# Altium PCB PCB_PDB.PcbDoc
Units mm, origin at the board's own origin, x right, y up, seen from the top; angles counter-clockwise.
Board outline 100 x 100 mm, 2 copper layers (Top Layer, Bottom Layer); 64 components, 16 nets, 168 pads, 9 vias.
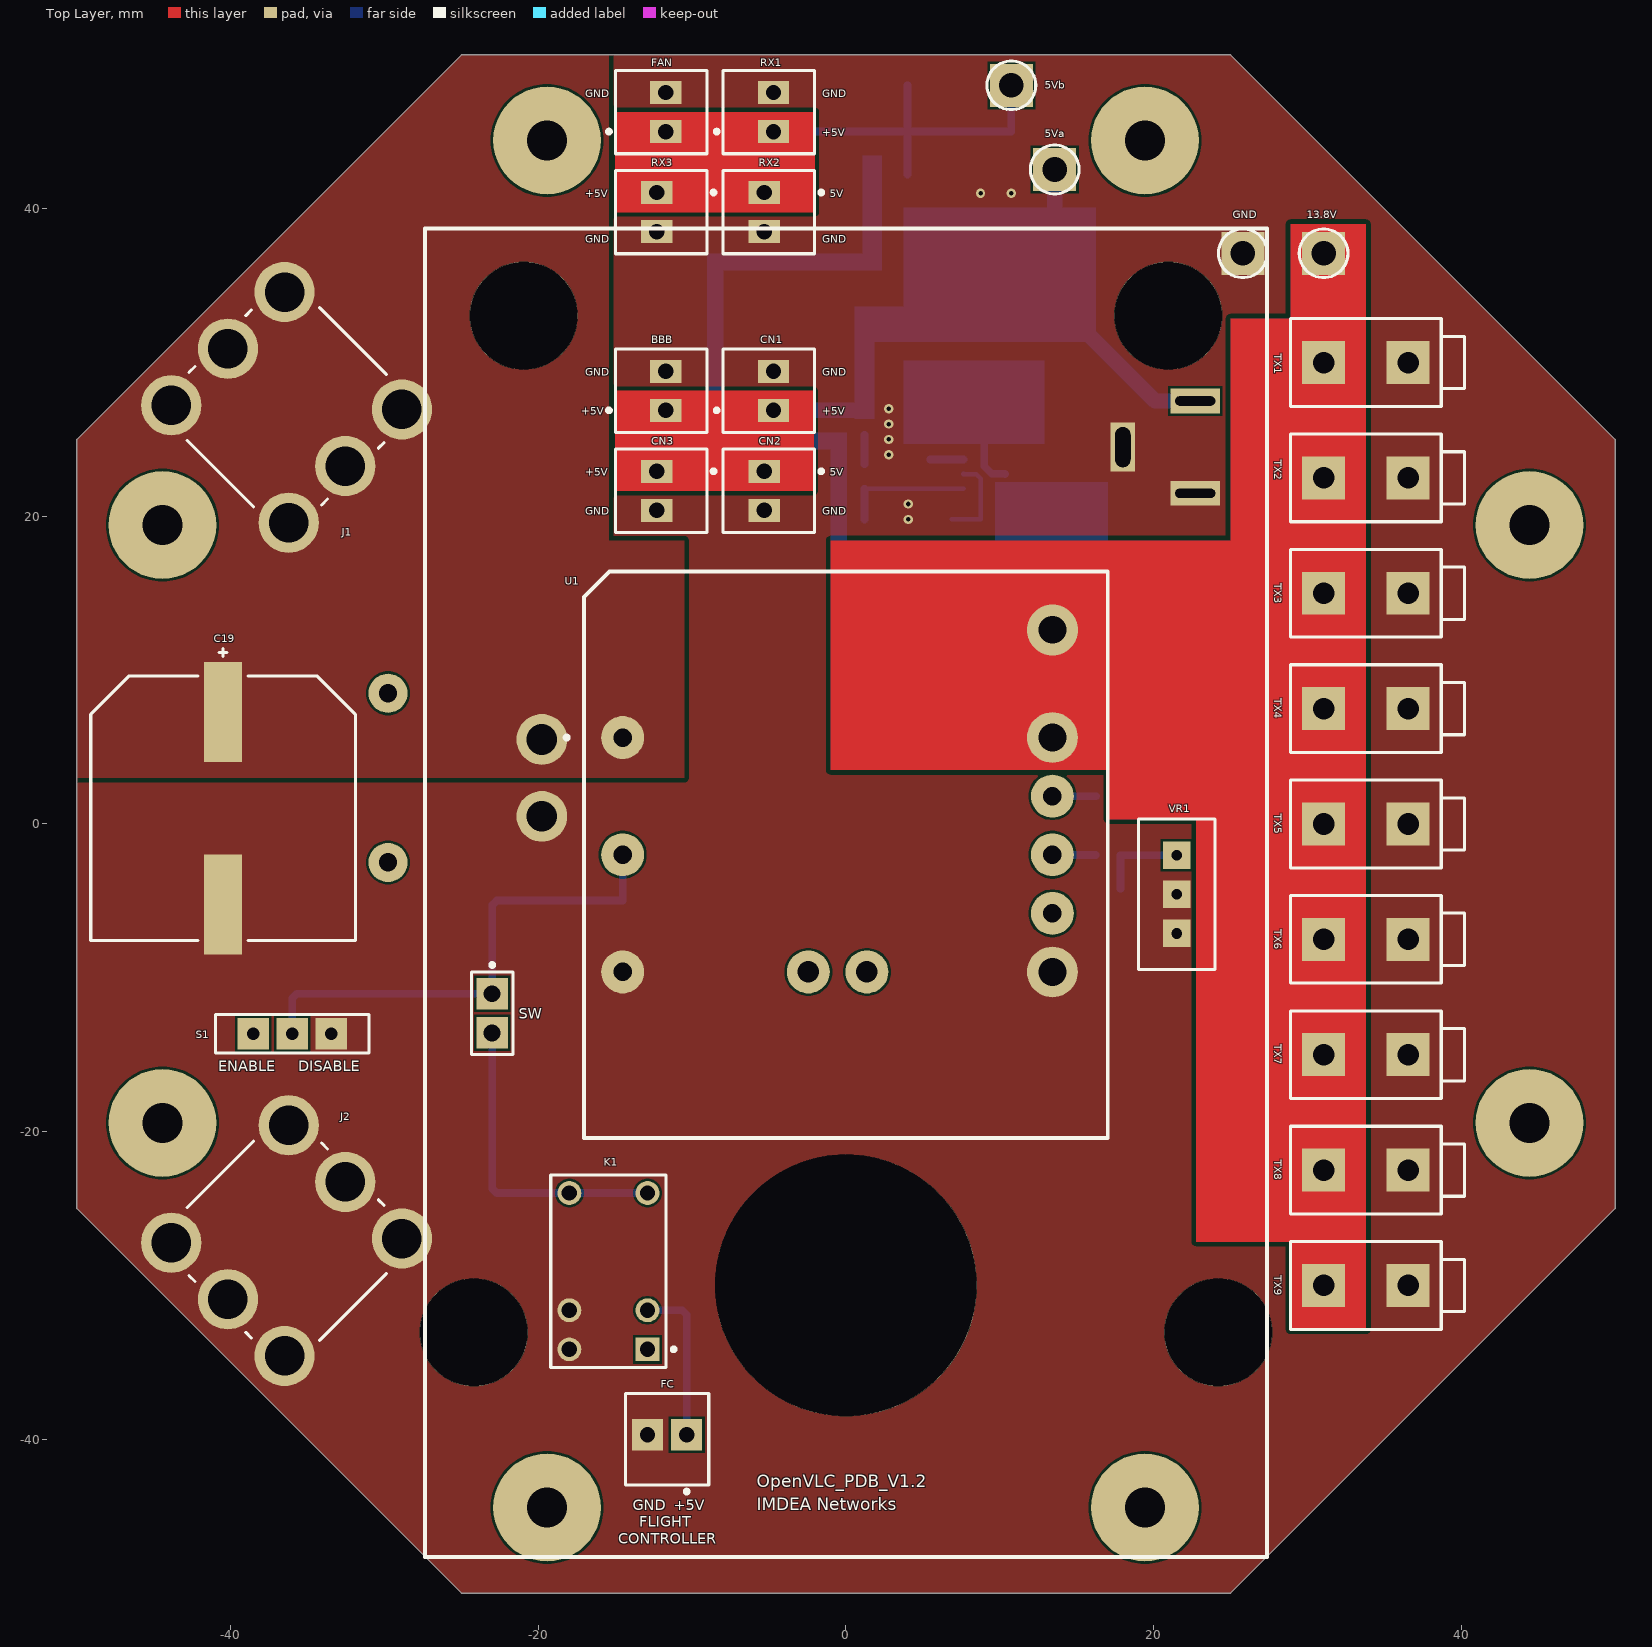
[diagram p0: Top Layer view]
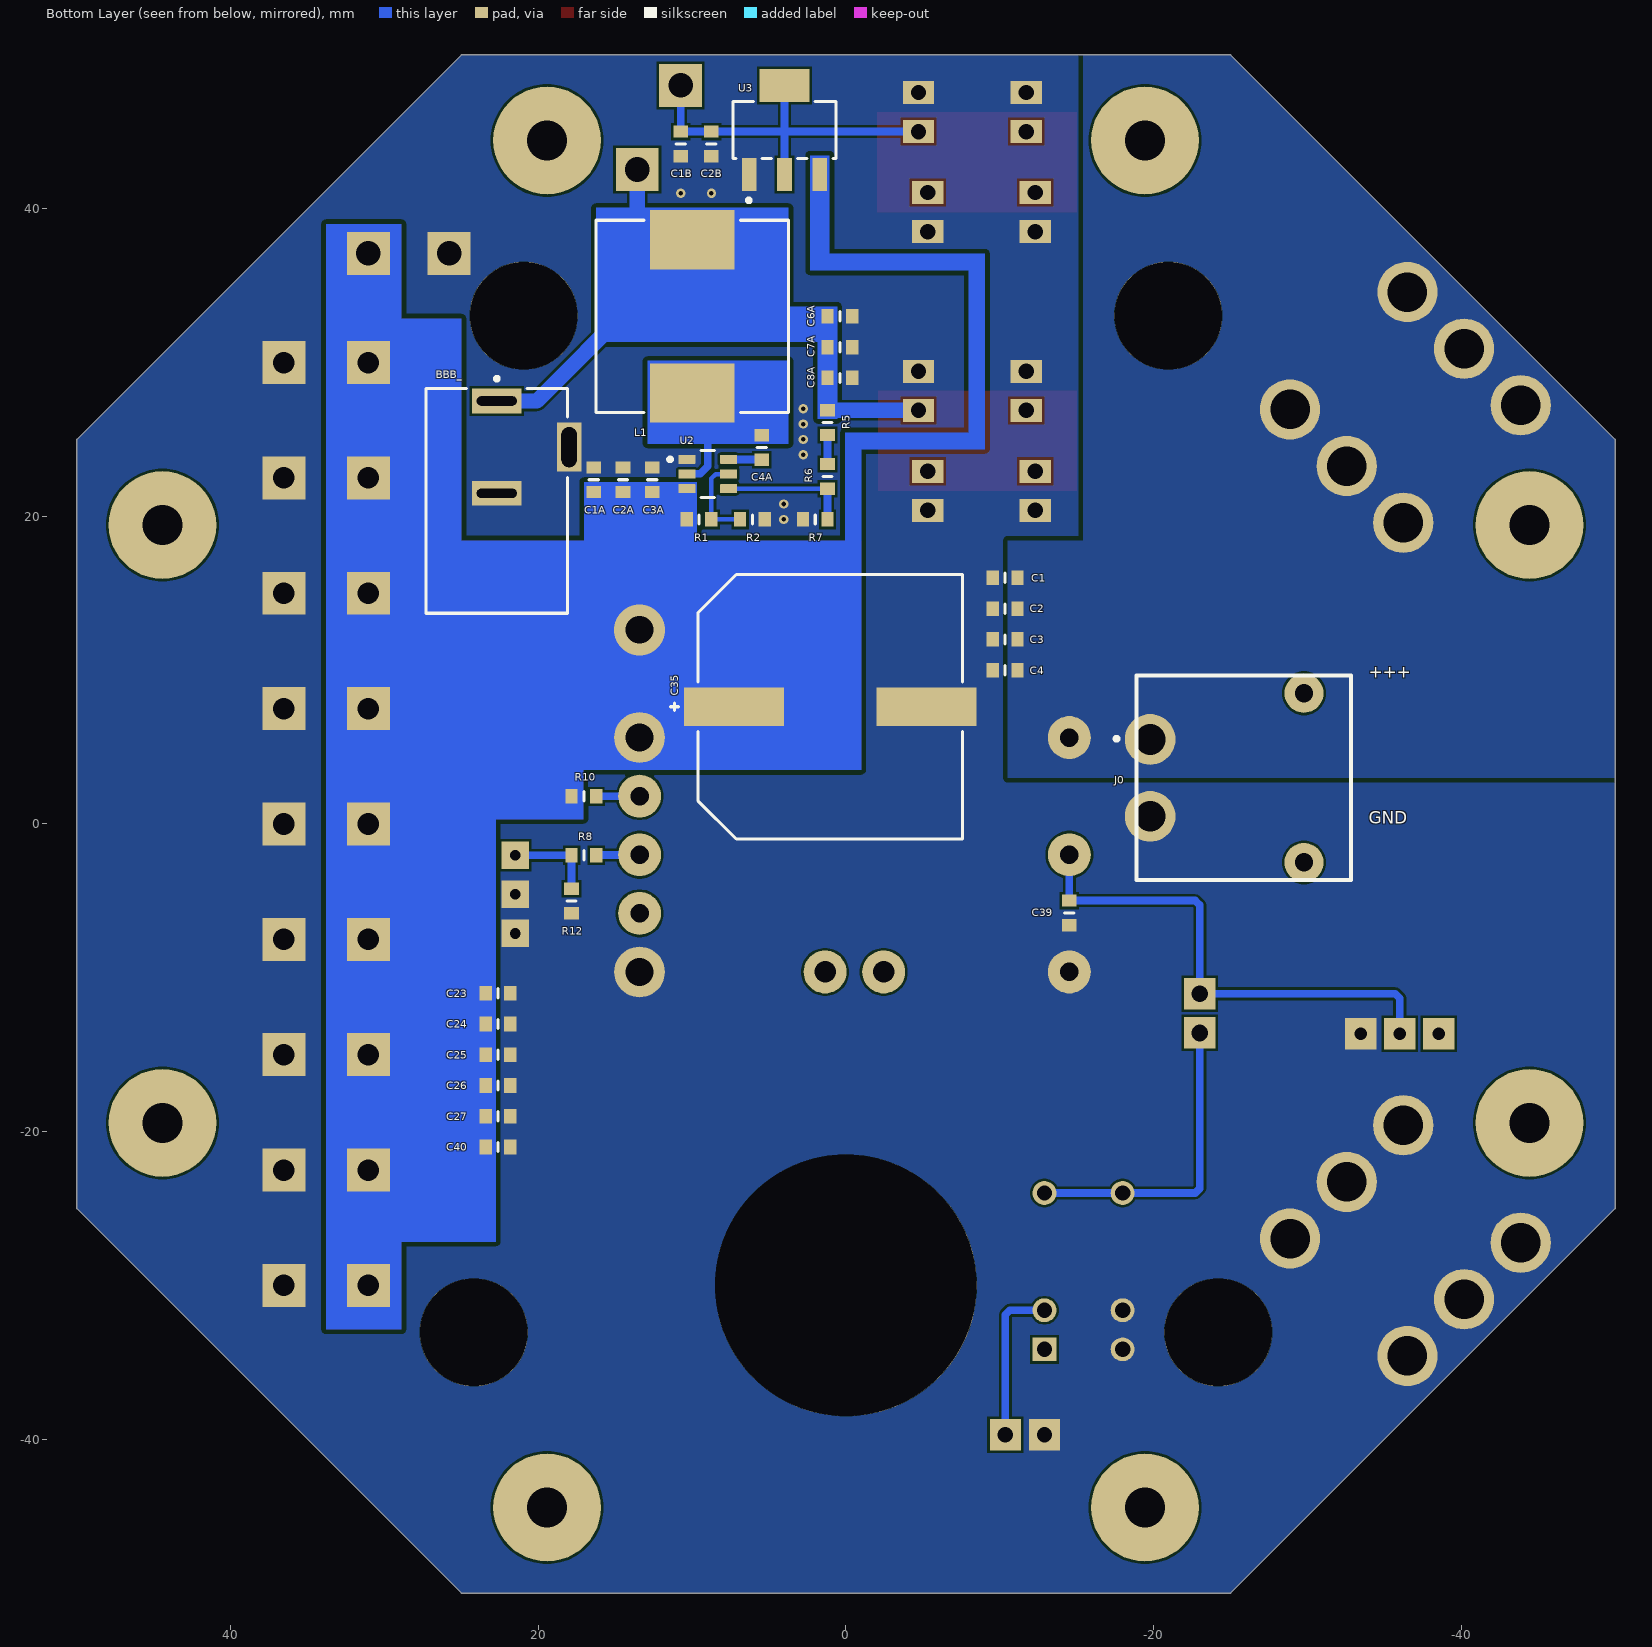
[diagram p1: Bottom Layer view, seen from below]
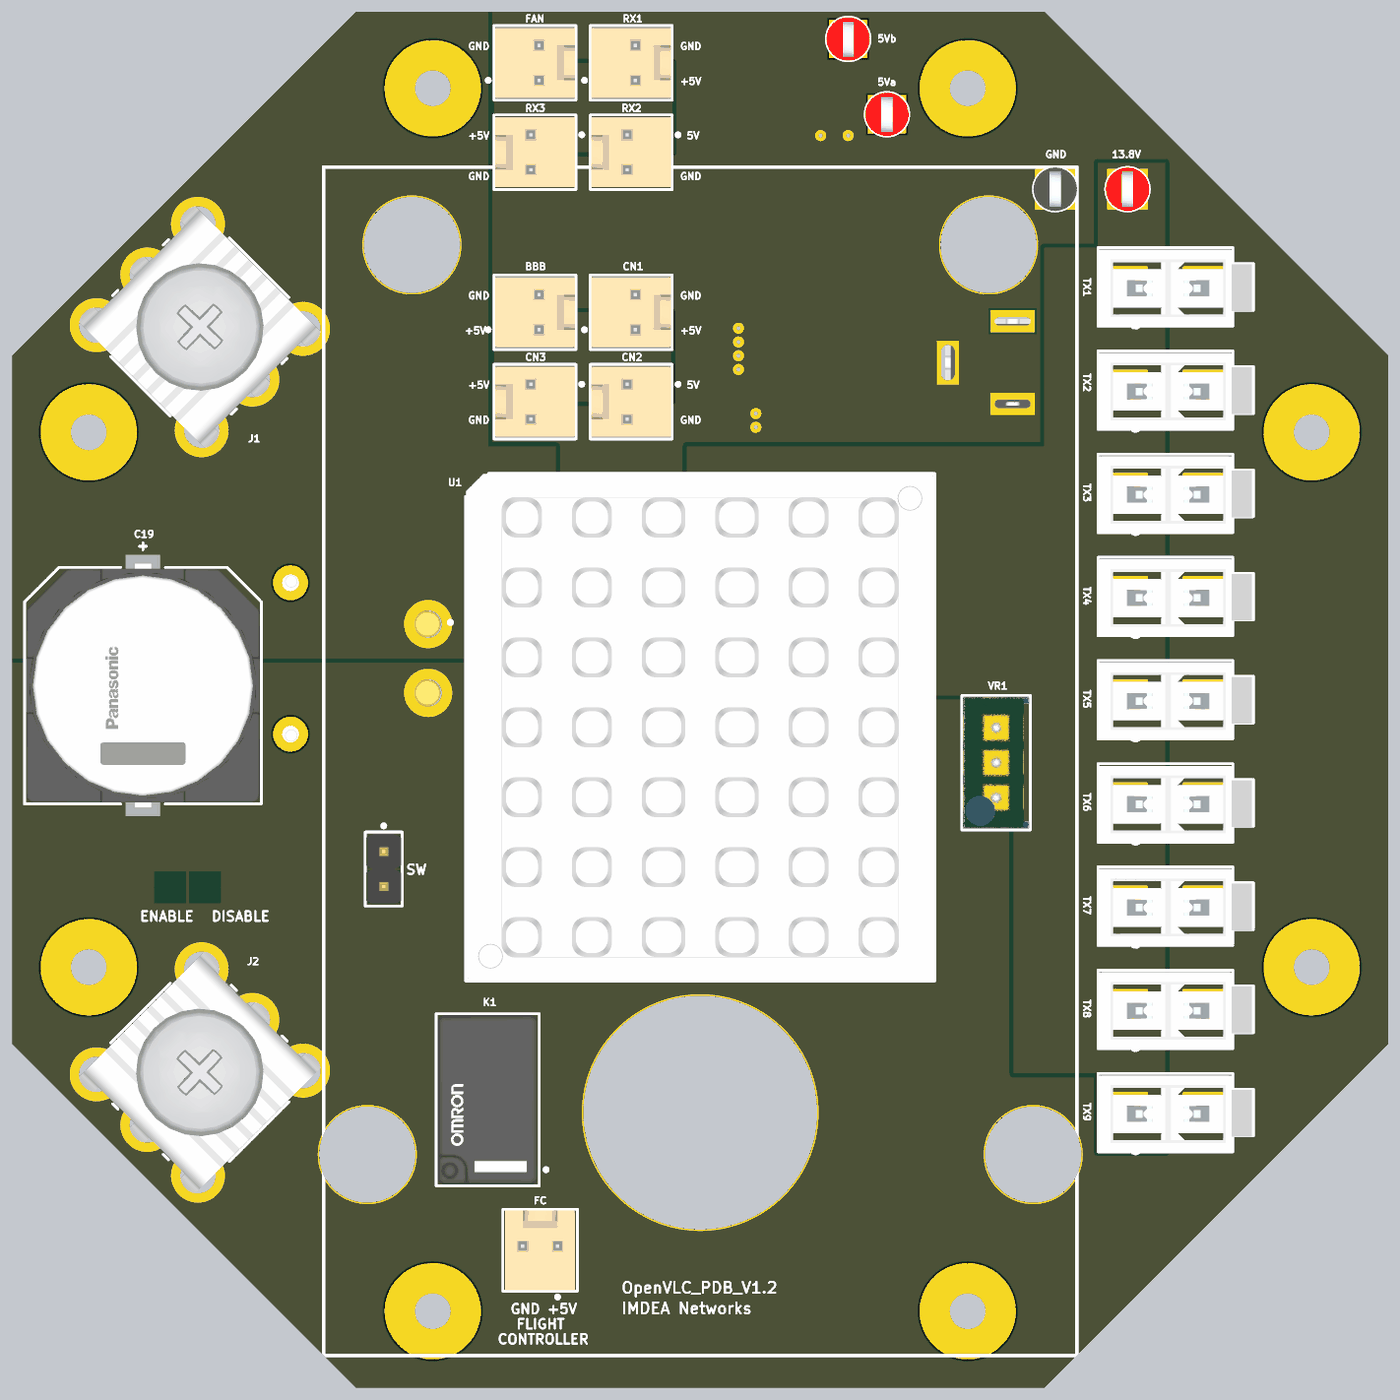
[diagram p2: 3D render of the assembled board from above, using the file's embedded part models]

## Layer stack, top to bottom
Top Solder: solder mask 0.0102, Solder Resist, Dk 3.5
Top Layer: signal copper 0.07
Dielectric1: dielectric 0.32, FR-4, Dk 4.8
Bottom Layer: signal copper 0.07
Bottom Solder: solder mask 0.0102, Solder Resist, Dk 3.5

## Board outline
-50,-25 -25,-50 25,-50 50,-25 50,25 25,50 -25,50 -50,25

## Design rules (kind name [scope] priority, off if disabled: settings)
Clearance Clearance_1 [(InNet('GND') AND InComponent('DC-DC'))] p1: gap=0.5 ignorepadtopadclearanceinfootprint=FALSE except(0: Arc-Hole Track-Hole SMDPad-Hole THPad-Hole Via-Hole Fill-Hole Poly-Hole Region-Hole Text-Hole)
Clearance [All] p2: gap=0.15 ignorepadtopadclearanceinfootprint=FALSE except(0: Arc-Hole Track-Hole SMDPad-Hole THPad-Hole Via-Hole Fill-Hole Poly-Hole Region-Hole Text-Hole; 0.3: Fill-Fill Fill-Poly Fill-Region Poly-Poly Poly-Region Region-Region)
DiffPairsRouting [All] p1: maxlimit=0.3 minlimit=0.3 mostfreqgap=0.3 toplayer_minwidth=0.381 toplayer_maxwidth=0.381 toplayer_prefwidth=0.381 bottomlayer_minwidth=0.381 bottomlayer_maxwidth=0.381 bottomlayer_prefwidth=0.381 maxuncoupledlength=12.7
Height [All] p1: minheight=0 maxheight=40 prefheight=12.7
HoleSize [All] p1: absolutevalues=TRUE maxlimit=2.54 minlimit=0.25 maxpercent=80.000 minpercent=20.000
MinimumSolderMaskSliver [All] p1: minsoldermaskwidth=0.15
PlaneClearance [All] p1: clearance=0.5
PlaneConnect [All] p1: planeconnectstyle=Direct reliefexpansion=0.508 reliefentries=4 reliefconductorwidth=0.254 reliefairgap=0.254
PolygonConnect PolygonConnect_1 [IsVia & InNet('GND')] p1: connectstyle=Direct reliefconductorwidth=0.254 reliefentries=4 polygonreliefangle="90 Angle" airgapwidth=0
PolygonConnect [All] p2: connectstyle=Direct reliefconductorwidth=0.254 reliefentries=4 polygonreliefangle="90 Angle" airgapwidth=0.254
RoutingVias [All] p1: holewidth=0.711 width=1.27 viastyle="Through Hole" minholewidth=25 minwidth=0.55 maxholewidth=0.711 maxwidth=1.27
SMDNeckDown [All] p1: percent=80.000
SilkToSilkClearance [All] p1: silktosilkclearance=0.15
SilkToSolderMaskClearance [IsPad] p1: minsilkscreentomaskgap=0.15 clearancetoexposedcopper=TRUE
SolderMaskExpansion [All] p1: expansion=0.102 istentingtop=FALSE
SupplyNets "Schematic Supply Nets_1" [InNet('+13.8V')] p1: voltage=0.000
SupplyNets "Schematic Supply Nets" [InNet('GND')] p2: voltage=0.000
Width [All] p1: maxlimit=1 minlimit=0.15 preferedwidth=0.3 minimp=50.000000 maximp=50.000000 favimp=50.000000
22 further rules are at their usual default settings.

## Components (designator, comment, footprint, x,y, rotation, side; value= is the part's Value field where it differs from the comment)
5Va "5010" KSTN-5010_V 13.57,42.547 r90 top
5Vb "5010" KSTN-5010_V 10.75,48.02 r90 top
13.8V "5010" KSTN-5010_V 31.05,37.1 r90 top
BBB "61900211121" 61900211121#1 -12.011,28.159 r270 top
BBB_ "PJ-102A" FP-PJ-102A-MFG 22.7,21 r0 bottom
C1 "GRM188R6YA106MA73D" RESC1608X55N -10.35,16 r180 bottom value=10uF
C1A "GRM188R6YA106MA73D" RESC1608X55N 16.4,22.38 r270 bottom value=10uF
C1B "GRM188R6YA106MA73D" RESC1608X55N 10.75,44.214 r90 bottom value=10uF
C2 "GRM188R6YA106MA73D" RESC1608X55N -10.35,14 r180 bottom value=10uF
C2A "GRM188R6YA106MA73D" RESC1608X55N 14.5,22.38 r270 bottom value=10uF
C2B "GCM188R71H104KA57J" RESC1608X55N 8.75,44.214 r270 bottom value=100nF
C3 "GRM188R6YA106MA73D" RESC1608X55N -10.35,12 r180 bottom value=10uF
C3A "GRM188R6YA106MA73D" RESC1608X55N 12.6,22.38 r270 bottom value=100nF
C4 "GCM188R71H104KA57J" RESC1608X55N -10.35,10 r0 bottom value=100nF
C4A "GRM188R6YA106MA73D" RESC1608X55N 5.473,24.479 r270 bottom value=100nF
C6A "GRM188R6YA106MA73D" RESC1608X55N 0.4,33 r0 bottom value=22uF
C7A "GRM188R6YA106MA73D" RESC1608X55N 0.4,31 r0 bottom value=22uF
C8A "GCM188R71H104KA57J" RESC1608X55N 0.4,29 r180 bottom value=100nF
C19 "EEE-FK1H102AV" CAP-17x17 -40.5,1 r0 top
C23 "GRM188R6YA106MA73D" RESC1608X55N 22.62,-11 r0 bottom value=10uF
C24 "GRM188R6YA106MA73D" RESC1608X55N 22.62,-13 r0 bottom value=10uF
C25 "GRM188R6YA106MA73D" RESC1608X55N 22.62,-15 r0 bottom value=10uF
C26 "GRM188R6YA106MA73D" RESC1608X55N 22.62,-17 r0 bottom value=10uF
C27 "GRM188R6YA106MA73D" RESC1608X55N 22.62,-19 r0 bottom value=10uF
C35 "EEE-FK1H102AV" CAP-17x17 1,7.62 r90 bottom
C39 "GCM188R71H104KA57J" RESC1608X55N -14.52,-5.777 r270 bottom value=100nF
C40 "GCM188R71H104KA57J" RESC1608X55N 22.62,-21 r0 bottom value=100nF
CN1 "61900211121" 61900211121#1 -5.011,28.159 r270 top
CN2 "61900211121" 61900211121#1 -5.011,21.659 r90 top
CN3 "61900211121" 61900211121#1 -12.011,21.659 r90 top
FAN "61900211121" 61900211121#1 -12.011,46.284 r270 top
FC "61900211121" 61900211121#2 -11.633,-40 r0 top
GND "5011" KSTN-5011_V 25.8,37.1 r90 top
J0 "XT30PW-M" XT30-Footprint-1 -25.849,3 r270 bottom
J1 "8196" FP-8196-MFG -36.365,27.085 r45 top
J2 "8196" FP-8196-MFG -36.365,-27.085 r135 top
K1 "G5V-13 DC5" FP-G5V-13_DC5-MFG -15.443,-29.072 r90 top
L1 "SLF12575T-330M3R2-PF" EATN-DR125_V 10,33 r90 bottom
R1 "RN73R1JTTD53R0B25" RESC1608X55N 9.55,19.8 r180 bottom value=174k
R2 "RN73R1JTTD53R0B25" RESC1608X55N 6.085,19.8 r180 bottom value=36k5
R5 "RN73R1JTTD53R0B25" RESC1608X55N 1.2,26.089 r270 bottom value=49.9
R6 "RN73R1JTTD53R0B25" RESC1608X55N 1.2,22.602 r270 bottom value=52k3
R7 "RN73R1JTTD53R0B25" RESC1608X55N 2,19.8 r0 bottom value=10k
R8 "RN73R1JTTD53R0B25" RESC1608X55N 17.041,-2.034 r0 bottom value=53
R10 "RMCF0603ZT0R00" RESC1608X55N 17.041,1.81 r180 bottom value=0
R12 "RK73H1JTTD2001D" RESC1608X55N 17.841,-5.01 r90 bottom value=3k
RX1 "61900211121" 61900211121#1 -5.011,46.284 r270 top
RX2 "61900211121" 61900211121#1 -5.011,39.784 r90 top
RX3 "61900211121" 61900211121#1 -12.011,39.784 r90 top
S1 "450301014042" 450301014042 -1306,-1283.64 r180 top
SW "61300211121" 61300211121 -23,-12.305 r270 top
TX1 "64900221122" 64900221122 33.8,30 r270 top
TX2 "64900221122" 64900221122 33.8,22.5 r270 top
TX3 "64900221122" 64900221122 33.8,15 r270 top
TX4 "64900221122" 64900221122 33.8,7.5 r270 top
TX5 "64900221122" 64900221122 33.8,0 r270 top
TX6 "64900221122" 64900221122 33.8,-7.5 r270 top
TX7 "64900221122" 64900221122 33.8,-15 r270 top
TX8 "64900221122" 64900221122 33.8,-22.5 r270 top
TX9 "64900221122" 64900221122 33.8,-30 r270 top
U1 "iC7" "New footprint 1" 0,-2 r0 top
U2 "TPS56339DDCR" FP-DDC0006A-MFG 8.988,22.752 r180 bottom
U3 "TLV76150DCYR" FP-DCY0004A-MFG 4,45.12 r90 bottom
VR1 "3296W-1-503LF" FP-3296W-MFG 21.5,-4.574 r0 top

## Footprints (in the part's own frame and the unit in brackets; to place one, negate y for a bottom-side part, rotate by r counter-clockwise, add the part's x,y. Pads: shape width x height; smd on the part's side, far side on the other; paste and mask are expansions set on the pad)
61300211121 [mil] "Pin Header, pitch 2.54 mm, THT, Vertical, single row, 2p"
  rect 80x80 hole 43.31: 1(-50,0) 2(50,0)
  silkscreen extent -129,-53 106,53, body extent -100,-50 100,50, height 337
61900211121#1 [mm] "2.54mm Male Locking Header, 2p"
  rect 1.5x2.032 hole 1: 1(1.27,0.3) 2(-1.27,0.3)
  silkscreen extent -2.71,-3.52 2.71,2.98, body extent -2.54,-2.9 2.54,2.9, height 11.53
61900211121#2 [mm] "2.54mm Male Locking Header, 2p"
  rect 2.032x2.032 hole 1: 1(1.27,0.3) 2(-1.27,0.3)
  silkscreen extent -2.71,-3.52 2.71,2.98, body extent -2.54,-2.9 2.54,2.9, height 11.53
64900221122 [mm] "4.20mm Male Dual Row Vertical Header, 2p"
  rect 2.794x2.794 hole 1.4: 1(0,-2.75) 2(0,2.75)
  silkscreen extent -2.85,-4.9 2.85,6.4, body extent -2.7,-4.8 3.1,6.3, height 12.85
450301014042 [mil] "THT Mini Slide Switch, body 10x2.5mm"
  rect 80x80 hole 31.5: COM(-50000,-50000) L1(-49900,-50000) L2(-50100,-50000)
  silkscreen extent -50197,-50049 -49803,-49951, body extent -50197,-50049 -49803,-49951, height 253
CAP-17x17 [mm]
  rect 2.5x6.5 smd paste+0 mask+0: 1(0,6.277) 2(0,-6.223)
  silkscreen extent -8.6,-8.57 8.6,10.4, body extent -8.5,-8.82 8.5,8.88, height 17
EATN-DR125_V [mm] "SMD, 2-Leads, Body 12.5x12.5mm"
  rect 3.85x5.5 smd: 1(-4.975,0) 2(4.975,0)
  silkscreen extent -6.25,-6.25 6.25,6.25, body extent -6.25,-6.25 6.25,6.25, height 6
FP-3296W-MFG [mm]
  rect 1.778x1.778 hole 0.7 paste-2539.97 mask+0: 1(0.005,-2.54) 2(0.005,0) 3(0.005,2.54)
  silkscreen extent -2.48,-4.89 2.48,4.89, body extent -2.58,-4.99 2.58,4.99, height 0.25
FP-8196-MFG [mm]
  round 3.92 hole 2.57 paste-2539.97 mask+0: 1(-5.207,5.398) 1(-5.207,-5.398) 1(0,5.398) 1(0,-5.398) 1(5.207,5.398) 1(5.207,-5.398)
  silkscreen extent -6.1,-6.1 6.1,6.1, body extent -7.27,-7.46 7.27,7.46, height 0.25
FP-DCY0004A-MFG [mm]
  rect 2.15x0.95 smd paste+0 mask+0: 1(-2.9,2.3) 2(-2.9,0) 3(-2.9,-2.3)
  rect 2.15x3.25 smd paste+0 mask+0: 4(2.9,0)
  silkscreen extent -4.7,-3.35 1.85,3.35, body extent -3.5,-3.25 3.5,3.25, height 1.8
FP-DDC0006A-MFG [mm]
  rrect17% 1.1x0.6 smd paste+0 mask+0: 1(-1.35,0.95) 2(-1.35,0) 3(-1.35,-0.95) 4(1.35,-0.95) 5(1.35,0) 6(1.35,0.95)
  silkscreen extent -2.58,-1.53 0.42,1.53, body extent -1.4,-1.45 1.4,1.45, height 1.1
FP-G5V-13_DC5-MFG [mm]
  rect 1.55x1.55 hole 1 paste-2539.97 mask+0: 1(-5.08,-2.54)
  round 1.55 hole 1 paste-2539.97 mask+0: 2(-2.54,-2.54) 5(5.08,-2.54) 6(5.08,2.54) 9(-2.54,2.54) 10(-5.08,2.54)
  silkscreen extent -6.25,-4.37 6.25,3.75, body extent -6.35,-3.85 6.35,3.85, height 0.25
FP-PJ-102A-MFG [mm]
  rect 3.2x1.6 hole 0.6 slot 2.6 at 0 deg paste-2539.97 mask+0: 1(0,-6.5) 2(0,-0.5)
  rect 1.6x3.2 hole 2.6 slot 1 at 0 deg paste-2539.97 mask+0: 3(-4.7,-3.5)
  silkscreen extent -4.6,-8.07 4.6,7.3, body extent -4.9,-7.2 4.5,7.2, height 11.2
KSTN-5010_V [mil] "Test Point, Dia 3.17mm"
  rect 110x110 hole 62.99: 1(0,0)
  silkscreen extent -62,-62 62,62, body extent -62,-62 63,63, height 320
KSTN-5011_V [mil] "Test Point, Dia 3.17mm"
  rect 110x110 hole 62.99: 1(0,0)
  silkscreen extent -62,-62 62,62, body extent -62,-62 63,63, height 320
"New footprint 1" [mil]
  round 110 hole 47.24: 1(-571.65,300) 2(-571.65,0) 3(-571.65,-300) 5(528.35,-150) 6(528.35,0) 7(528.35,150)
  round 130 hole 70.87: 4(528.35,-300) 8(528.35,300)
  round 110 hole 55: 9(-96.46,-300) 10(53.54,-300)
  silkscreen extent -720,-725 670,725, body extent -670,-725 670,725, height 1056
RESC1608X55N [mm]
  rect 0.8x0.95 smd: 1(-0.8,0) 2(0.8,0)
  silkscreen extent 0,-0.3 0,0.3
XT30-Footprint-1 [mm]
  round 3.302 hole 2: 1(-2.5,-6.075) 2(2.5,-6.075)
  round 2.54 hole 1.2: 3(5.5,3.925) 4(-5.5,3.925)
  silkscreen extent -6.65,-8.38 6.65,6.98, body extent -6.65,-6.98 6.65,6.98, height 5.5

## Part data
5Va 5Vb 13.8V: library part CMP-1672-00002-4, "Test Point, Red, Through Hole, RoHS, Bulk", Colour=Red, Manufacturer=Keystone, Package Quantity=100, ComponentLink1Description="Manufacturer URL", ComponentLink1URL=http://www.keyelco.com/, ComponentLink2Description=Datasheet, ComponentLink2URL=http://www.keyelco.com/product-pdf.cfm?p=1319, Contact Material=Bronze, Contact Plating=Silver, DatasheetVersion="Rev. F, 12/2013", Height="8.12 mm", Mount="Through Hole", Mounting Technology="Through Hole", PackageDescription="1-Pin Through Hole Device, Dia 3.17 mm", PackageReference=5010, Packaging=Bulk, Pins=1, REACH SVHC="No SVHC", RoHSCompliant=true
BBB CN1 CN2 CN3 FAN FC RX1 RX2 RX3: library part CMP-1502-00584-3, Color=Beige, Contact Resistance=20mΩ, Current Rating=3A, Flammability Rating="UL94 V-0", Insulation Resistance=1GΩ, Max Operating Temperature=105°C, Min Operating Temperature=-40°C, Operating Supply Voltage=250V, Connector Type="Male Pin", Contact Gender=Male, Contact Material=Copper, Contact Mating Length=7.493mm, Contact Plating=Tin, Fastening Type=Friction, Gender=Male, Height=11.75mm, Housing Material=Nylon, Lead Pitch=2.54mm, Length=5.08mm, Mount="Through Hole", NexarPartId=18818218, Number of Contacts=2, Number of Pins=2, Number of Positions=2, Number of Rows=1, Orientation=Vertical, Packaging=Bulk, Pitch=2.54mm, REACH SVHC=Unknown, RoHS=Compliant, Termination="Through Hole", Voltage Rating=250V, Width=5.12mm
BBB_: library part CMP-12637-106234071-1, "PJ-102A 2.0 x 6.5 mm, 2.5 A, Horizontal, Through Hole, Tapered Pins, Dc Power Jack Connector", Color=Black, Current Rating=2.5A, Flammability Rating="UL94 V-0", Insulation Resistance=50MΩ, Max Operating Temperature=85°C, Min Operating Temperature=-25°C, Voltage Rating=24V, Contact Gender=Male, Contact Material="Copper, Nickel, Tin", Contact Plating=Nickel, Diameter=2.1mm, Gender=Male, Height=11.2mm, Housing Color=Black, Housing Material=Thermoplastic, Inside Diameter=2mm, Lead Free="Lead Free", Lifecycle Status=Production, Mount="Through Hole", NexarPartId=106234071, Number of Conductors=2, Number of Contacts=3, Orientation=Horizontal, Outside Diameter=6.5mm, Packaging=Bulk, RoHS=Compliant, Schedule B="8536695050, 8536695050", Shielding=No, Termination="Through Hole", Voltage Rating (DC)=24V
C1 C1A C1B C2 C2A C2B C3 C3A C4 C4A C6A C7A C8A C23 C24 C25 C26 C27 C39 C40: library part Cap, "Capacitor", LatestRevisionDate=17-Jul-2002, LatestRevisionNote="Re-released for DXP Platform.", PackageDescription="Radial Cap, Thru-Hole; 2 Leads; 0.3 in Pin Spacing", PackageReference=RAD-0.3, Published=8-Jun-2000, Publisher="Altium Limited"
C19 C35: library part CMP-001-00083-1, "CAP-17x17"
GND: library part CMP-1672-00003-4, "Test Point, Black, Through Hole, RoHS, Bulk", Colour=Black, Manufacturer=Keystone, Package Quantity=100, ComponentLink1Description="Manufacturer URL", ComponentLink1URL=http://www.keyelco.com/, ComponentLink2Description=Datasheet, ComponentLink2URL=http://www.keyelco.com/product-pdf.cfm?p=1320, Contact Material=Bronze, Contact Plating=Silver, DatasheetVersion="Rev. F, 12/2013", Height="8.12 mm", Mount="Through Hole", Mounting Technology="Through Hole", PackageDescription="1-Pin Through Hole Device, Dia 3.17 mm", PackageReference=5011, Packaging=Bulk, Pins=1, REACH SVHC="No SVHC", RoHSCompliant=true
J0: library part CMP-00002-1
J1 J2: library part CMP-00214-00036902-2, "8196 PC Screw Terminal 0.67 in. L Brass Tin Plate Stainless Steel Mounting Hole 0.045 in. T", Current Rating=30A, Connector Type="PCB, Terminal Block", Contact Material=Brass, Contact Plating=Tin, Depth=11.93mm, Gender=Female, Height=11.7602mm, Insulation=Non-Insulated, Lead Free="Lead Free", Length=11.93mm, Material=Brass, Max Current Rating=30A, Mount="Snap in, Through Hole", NexarPartId=36902, Number of Contacts=6, Number of Pins=6, Number of Ports=1, Number of Rows=2, Number of Terminals=6, Orientation=Straight, Packaging=Bulk, REACH SVHC="No SVHC", RoHS=Compliant, Terminal Material=Brass, Termination=Screw, Wire Gauge (Max)=12AWG, Wire Gauge (Min)=22AWG
K1: library part CMP-08823-000054-1, "RELAY GEN PURPOSE SPDT 1A 5VDC", Coil Current=30mA, Coil Power=150mW, Coil Resistance=167R, Coil Voltage (DC)=5V, Contact Current Rating=1A, Max Operating Temperature=70°C, Min Operating Temperature=-40°C, Package Quantity=25, Coil Type=Non-Latching, Contact Material=Gold, Mount="Through Hole", Operate Time=5ms, Packaging=Rail/Tube, Power Consumption=150mW, Relay Type="General Purpose", Release Time=5ms, Series=G5V-1, Termination="PC Pin", Throw Configuration=SPDT
L1: library part CMP-2000-06178-1, "High Power Density, High Efficiency, Shielded Inductor, 100 uH, 1.78 A, -40 to 125 degC, 2-Pin SMD, RoHS, Tape and Reel", Case Size/Dimension=12.5x12.5x6mm, DC Resistance=0.17O, Inductance-Nom=100µH, Manufacturer=EATON, Package Description="2-Pin Surface Mount Device, Body 12.5 x 12.5 mm", Package Reference=DR125, Rated Current-Max=1.78A, Tolerance (%)=±20%, Datasheet URL=https://ciiva.com/datasheet-click-3083294?src=ciiva&sig=4634c5cd, Datasheet Version=04/2014, Manufacturer URL=http://www.eaton.com/, Mounting Technology=SurfaceMount, Shielding=Yes
R1 R2 R5 R6 R7 R8 R10 R12: library part Res1, "Resistor", LatestRevisionDate=17-Jul-2002, LatestRevisionNote="Re-released for DXP Platform.", PackageDescription="Axial Device, Thru-Hole; 2 Leads; 0.3 in Pin Spacing", PackageReference=AXIAL-0.3, Published=8-Jun-2000, Publisher="Altium Limited"
S1: library part CMP-1466-00001-2, Color=Grey, Contact Current Rating=500mA, Contact Resistance=30mΩ, Insulation Resistance=10GΩ, Max Operating Temperature=85°C, Min Operating Temperature=-40°C, Voltage Rating=12V, Actuator Length=1.4mm, Actuator Material="Nylon, Polyamide", Contact Material=Gold, Contact Plating=Gold, Current Rating=500mA, Electrical Life=2kcycles, Height=5.9mm, Lead Free="Lead Free", Length=8.42mm, Life (Cycles)=2kcycles, Mechanical Life=2kcycles, Mount="Through Hole", NexarPartId=23825802, Orientation=Vertical, Packaging=Bulk, REACH SVHC="No SVHC", RoHS=Compliant, Switch Function=On-On, Switch Travel=1.6mm, Termination="PC Pin", Throw Configuration=SPDT, Voltage Rating (DC)=12V, Width=2.5mm
SW: library part CMP-1712-00002-6, Color=Black, Contact Resistance=20mΩ, Current Rating=3A, Max Operating Temperature=125°C, Min Operating Temperature=-40°C, Operating Supply Voltage=250V, Connector Type="Male Pin", Contact Gender=Male, Contact Material=Copper, Contact Mating Length=5.9944mm, Contact Plating=Gold, Gender=Male, Height=8.94mm, Housing Material=PBT, Lead Free="Lead Free", Lead Pitch=2.54mm, Mount="Through Hole", NexarPartId=20081794, Number of Contacts=2, Number of Pins=2, Number of Positions=2, Number of Rows=1, Orientation=Vertical, Packaging=Bulk, Pitch=2.54mm, REACH SVHC="No SVHC", RoHS=Compliant, Termination="Through Hole", Voltage Rating=250V
TX1 TX2 TX3 TX4 TX5 TX6 TX7 TX8 TX9: library part CMP-1502-00493-2, Color=White, Contact Resistance=10mΩ, Current Rating=9A, Flammability Rating="UL94 V-0", Insulation Resistance=1GΩ, Max Operating Temperature=105°C, Min Operating Temperature=-40°C, Operating Supply Voltage=600V, Connector Type="Male Pin, Socket", Contact Gender=Male, Contact Material=Copper, Contact Plating=Tin, Fastening Type=Ramp, Gender=Male, Height=12.8mm, Housing Material=Nylon, Lead Length=3.5mm, Lead Pitch=4.2mm, Length=5.4mm, Mount="Through Hole", NexarPartId=8917578, Number of Contacts=2, Number of Pins=2, Number of Positions=2, Number of Rows=2, Orientation=Vertical, Pitch=4.2mm, REACH SVHC=Unknown, RoHS=Compliant, Row Spacing=5.5118mm, Termination=Solder, Voltage Rating=600V, Width=5.5mm
U1: library part CMP-00000-3, "DC-DC Converters, PCB mount type, Output: 300W, wide range (8 to 24V), Non-Isolated Step-up/Step-down"
U2: library part CMP-04918-000012-1, "PWR MGMT SPECIALIZED REGULATOR", Manufacturer="Texas Instruments", Max Junction Temp=+125°C, Max Supply Voltage=24V, Min Supply Voltage=4.5V, Nominal Supply Current=98uA, Output Current=3A, Output Voltage=0.8-16V, Package=DDC0006A, Switching Frequency=500kHz, Temperature="-40°C to +125°C", Temperature Range Low=-40°C, Automotive=No, Category=IC, ComponentLink2Description=Datasheet, ComponentLink2URL=http://www.ti.com/lit/ds/symlink/tps56339.pdf, Device Class L1="Integrated Circuits (ICs)", Device Class L2="Power Management ICs", Device Class L3="Voltage Regulators - Switching", Digikey Description="PWR MGMT SPECIALIZED REGULATOR", Height=1.1mm, Lead Free=Yes, Manufacturer Part Number=TPS56339DDCR, Max Duty Cycle=97%, Mouser Description="4.5-V to 24-V input, 3-A output synchronous buck converter 6-SOT-23-THIN -40 to 125", Number of Outputs=1, Octopart=https://octopart.com/tps56339ddcr-texas+instruments-101466410, Output Type=AdjustableProgrammable, RoHS=TRUE, Standoff Height=0mm, Switching Topology=Buck, Temperature Range High=+125°C
U3: library part CMP-00370-134324849-1, "TLV76150DCYR 1-A 16-V high-PSRR linear voltage regulator 4-SOT-223 -40 to 125", Case/Package=SOT-223, Dropout Voltage=900mV, Manufacturer Lifecycle Status=ACTIVE, Max Junction Temperature (Tj)=125°C, Max Supply Voltage=16V, Min Operating Temperature=-40°C, Min Supply Voltage=6.5V, Nominal Supply Current=65µA, Output Current=1A, Output Voltage=5V, Accuracy=1%, Height=1.8mm, Length=6.5mm, Lifecycle Status=Production, Max Operating Temperature=125°C, NexarPartId=134324849, Number of Channels=1, Number of Outputs=1, Number of Pins=4, Thickness=1.6mm, Width=3.5mm
VR1: library part CMP-07234-000043-1, "TRIMMER 50K OHM 0.5W PC PIN TOP", Color=Blue, Insulation Resistance=1GR, Manufacturer Series=3296, Max Operating Temperature=125°C, Max Power Dissipation=500mW, Min Operating Temperature=-55°C, Package Quantity=50, Resistance=50kR, Resistance Law=Linear, Resistance Tolerance=10%, Resistor Type=Cermet, Temperature Coefficient=100ppm/°C, Actuator Orientation=Vertical, Actuator Type=SCREW, Contact Plating=Tin, Depth=4.83mm, Height=0.395inch, Lead Free="Lead Free", Length=9.53mm, Military Standard=Not, Mount=Panel, Number of Pins=3, Number of Terminals/Pins=3, Number of Turns=25, Packaging=Rail/Tube, Power Rating=500mW, Radiation Hardening=No, REACH SVHC="No SVHC", RoHS Compliant=Yes, Series=3296, Taper=Linear, Technology=CERMET, Terminal Finish=Tin, Termination=Pin, Tolerance=10%, Type=Potentiometer, Weight=0.03oz, Width=9.53mm

## Free pads (board coordinates)
  round 7 hole 2.6: H(-44.435,-19.435) H(-44.435,19.435) H(-19.435,44.435) H(-19.435,-44.435) H(19.435,-44.435) H(19.435,44.435) H(44.435,-19.435) H(44.435,19.435)
  round 7 hole 7 unplated: H(-24.195,-33.05) H(-20.955,33.05) H(20.955,33.05) H(24.195,-33.05)
  round 17 hole 17 unplated: H(0,-30)

## Via types
v1: diameter 0.6, hole 0.3, Top Layer to Bottom Layer, 8 vias
v2: diameter 3.302, hole 1.8, Top Layer to Bottom Layer, 1 vias

## Nets (pads, with @x,y where several pads share a name; then routed paths per layer and width w, separated by ;. In a path a pad name is that pad's centre, name@x,y a point inside that pad or via, vN(x,y) a via of type N, cw(c..) or ccw(c..) an arc to the next point about the centre after c; other vN are vias at no path point)
+13.8V: 13.8V.1 C1A.2 C2A.2 C3A.2 C23.2 C24.2 C25.2 C26.2 C27.2 C35.1 C40.2 R1.1 R10.1 TX1.1 TX2.1 TX3.1 TX4.1 TX5.1 TX6.1 TX7.1 TX8.1 TX9.1 U1.8 U2.3 U3.3
  other v2: 13.42,12.62
GND: BBB.2 BBB_.2 BBB_.3 C1.1 C1A.1 C1B.1 C2.1 C2A.1 C2B.2 C3.1 C3A.1 C4.2 C6A.1 C7A.1 C8A.2 C19.2 C23.1 C24.1 C25.1 C26.1 C27.1 C35.2 C39.2 C40.1 CN1.2 CN2.2 CN3.2 FAN.2 FC.2 GND.1 J0.2 J2.1 K1.9 K1.10 R2.2 R7.2 R12.1 RX1.2 RX2.2 RX3.2 S1.L2 TX1.2 TX2.2 TX3.2 TX4.2 TX5.2 TX6.2 TX7.2 TX8.2 TX9.2 U1.3 U1.4 U2.1 U3.1 VR1.1 VR1.2
  other v1: 4.04,19.8 4.04,20.8 2.78,24 2.78,25 2.78,26 2.78,27 8.75,41 10.75,41
Net5Va_1: 5Va.1 BBB.1 BBB_.1 C6A.2 C7A.2 C8A.1 CN1.1 CN2.1 CN3.1 L1.2 R5.1 | length 28.8
  Bottom Layer w0.5: 1.2,27.889 1.2,32
  Bottom Layer w1: CN1.1 R5.1 ; L1.2 11.276,39.251 13.151,39.251 13.57,39.67 5Va.1 ; 13.733,33.864 20.097,27.5 BBB_.1
Net5Vb_1: 5Vb.1 C1B.2 C2B.1 FAN.1 RX1.1 RX2.1 RX3.1 U3.2 U3.4 | length 24.3
  Bottom Layer w0.5: RX1.1 4,45.014 ; U3.2 4,45.014 ; U3.4 4,45.014 ; 5Vb.1 C1B.2 4,45.014
NetC1_2: C1.2 C2.2 C3.2 C4.1 C19.1 J0.1 J1.1 U1.1
NetC4A_1: C4A.1 L1.1 U2.2 | length 7.4
  Bottom Layer w0.5: U2.2 10.322,22.767 9.472,22.767 8.988,23.252 8.988,27.164 L1.1@10.349,28.525
NetC4A_2: C4A.2 U2.6 | length 2.2
  Bottom Layer w0.5: C4A.2 5.484,23.69 7.626,23.69 U2.6
NetC39_1: C39.1 S1.COM SW.1 U1.2 | length 32.8
  Bottom Layer w0.5: S1.COM -36,-11.328 -35.707,-11.035 SW.1 -23,-5.27 -22.707,-4.977 C39.1 U1.2
NetFC_1: FC.1 K1.2 | length 10.5
  Bottom Layer w0.5: K1.2 -10.653,-31.612 -10.36,-31.905 FC.1@-10.36,-39.697
NetK1_5: K1.5 K1.6 SW.2 | length 20.3
  Bottom Layer w0.5: SW.2 -23,-23.699 -22.707,-23.992 K1.5
NetR1_2: R1.2 R2.1 U2.5 | length 5.8
  Bottom Layer w0.3: R2.1 R1.2 8.75,22.459 8.462,22.747 7.643,22.747 U2.5
NetR5_2: R5.2 R6.1 | length 1.9
  Bottom Layer w0.5: R6.1 R5.2
NetR6_2: R6.2 R7.1 U2.4 | length 8.4
  Bottom Layer w0.3: R6.2 U2.4
  Bottom Layer w0.5: R7.1 R6.2
NetR8_1: R8.1 U1.6 | length 2.8
  Bottom Layer w0.5: U1.6 13.437,-2.017 16.224,-2.017 R8.1
NetR8_2: R8.2 R12.2 VR1.3 | length 5.8
  Bottom Layer w0.5: R12.2 R8.2 VR1.3
NetR10_2: R10.2 U1.7 | length 2.9
  Bottom Layer w0.5: U1.7 R10.2@16.27,1.81
pads on no net: J0.3 J0.4 K1.1 S1.L1 U1.5 U1.9 U1.10

## Polygon pours and split planes (outlines as drawn)
GND on Bottom Layer "GND_L02_P029" (solid, pour order 29): -50,25 -25,50 25,50 50,25 50,-25 25,-50 -25,-50 -25,-50.001 -50,-25.001
NetC1_2 on Bottom Layer "NETC1_2_L02_P027" (solid, pour order 27): -10.5,3 -10.5,18.42 -15.411,18.42 -15.411,50 -25,50 -50,25 -50,3
GND on Top Layer "GND_L01_P028" (solid, pour order 28): -50,-25 -50,25 -25,50 25,50 50,25 50,-25 25,-50 -25,-50
NetC1_2 on Top Layer "NETC1_2_L01_P023" (solid, pour order 23): -50,3 -50,25 -25,50 -15.411,50 -15.411,18.42 -10.5,18.42 -10.5,3

## Other copper
Top Layer:
  region net Net5Va_1: -14.986,28.159 -2.111,28.159 -2.111,21.659 -14.986,21.659
  region net Net5Vb_1: -14.986,46.284 -2.036,46.284 -2.036,39.784 -14.986,39.784
  region net +13.8V: 28.9,39 33.8,39 33.8,-32.85 28.9,-32.85
  region net +13.8V: 23.98,18.42 33.8,18.42 33.8,-27.15 23.98,-27.15
  region net +13.8V: 22.769,18.42 28.9,18.42 28.9,-27.15 22.769,-27.15
  region net +13.8V: -0.986,18.42 28.9,18.42 28.9,3.515 -0.986,3.515
  region net +13.8V: 15.52,17.434 28.9,17.434 28.9,5.596 15.52,5.596
  region net +13.8V: 17.07,15.14 28.9,15.14 28.9,0.316 17.07,0.316
  region net +13.8V: 25,32.85 33.8,32.85 33.8,18.42 25,18.42
Bottom Layer:
  region net +13.8V: -0.986,18.42 28.9,18.42 28.9,3.515 -0.986,3.515
  region net Net5Va_1: 0.575,33.625 1.825,33.625 1.825,26.339 0.575,26.339
  region net Net5Va_1: 0.575,33.625 9.051,33.625 9.051,31.347 0.575,31.347
  region net Net5Va_1: 3.75,40.05 16.25,40.05 16.25,31.347 3.75,31.347
  region net NetC4A_1: 3.75,30.1 12.9,30.1 12.9,24.729 3.75,24.729
  region net +13.8V: -0.986,25.449 0.064,25.449 0.064,16.42 -0.986,16.42
  region net +13.8V: 9.706,22.221 17.016,22.221 17.016,16.42 9.706,16.42
  region net +13.8V: 1.075,43.445 2.325,43.445 2.325,35.994 1.075,35.994
  region net +13.8V: -9.036,37.074 2.325,37.074 2.325,35.994 -9.036,35.994
  region net +13.8V: -9.036,37.074 -7.986,37.074 -7.986,24.369 -9.036,24.369
  region net +13.8V: -9.036,25.449 0.064,25.449 0.064,24.369 -9.036,24.369
  region net +13.8V: 22.769,18.42 33.8,18.42 33.8,-27.15 22.769,-27.15
  region net +13.8V: 28.9,39 33.8,39 33.8,-32.85 28.9,-32.85
  region net +13.8V: 15.52,18.42 33.8,18.42 33.8,3.515 15.52,3.515
  region net +13.8V: 17.07,12.688 33.8,12.688 33.8,0.316 17.07,0.316
  region net +13.8V: 25,32.85 33.8,32.85 33.8,18.42 25,18.42

## Silkscreen, mask and mechanical layers (free items; w line width, h text height)
Top Overlay:
  lines w0.254: -27.375,-47.65 27.375,-47.65 27.375,38.71 -27.375,38.71 -27.375,-47.65
  text "GND" at -16.95,47.254 h0.5
  text "GND" at -1.549,47.254 h0.5
  text "+5V" at -1.549,44.714 h0.5
  text "+5V" at -16.95,40.754 h0.5
  text "5V" at -1.07,40.754 h0.5
  text "GND" at -16.95,37.8 h0.5
  text "GND" at -1.549,37.8 h0.5
  text "GND" at -16.95,29.129 h0.5
  text "GND" at -1.549,29.129 h0.5
  text "+5V" at -17.2,26.589 h0.5
  text "+5V" at -1.549,26.589 h0.5
  text "+5V" at -16.95,22.629 h0.5
  text "5V" at -1.07,22.629 h0.5
  text "GND" at -16.95,20.089 h0.5
  text "GND" at -1.549,20.089 h0.5
  text "ENABLE" at -40.8,-16.071 h0.7
  text "DISABLE" at -35.6,-16.071 h0.7
  text "OpenVLC_PDB_V1.2" at -5.813,-43.105 h0.8
  text "GND" at -13.878,-44.6 h0.7
  text "+5V" at -11.2,-44.6 h0.7
  text "IMDEA Networks" at -5.813,-44.6 h0.8
  text "FLIGHT" at -13.438,-45.7 h0.7
  text "CONTROLLER" at -14.812,-46.8 h0.7
Bottom Overlay:
  text "+++" at -34,9.5 h0.8
  text "GND" at -34,0 h0.8
Mechanical 1:
  lines w0.254: -25,-50 -25,-50 ; -25,-50 -50,-25 -50,25 -25,50 25,50 ; -25,-50 25,-50 ; 25,-50 25,-50 ; 25,-50 50,-25 50,25 25,50 ; 25,50 25,50